# Altium PCB PCB1.PcbDoc (part 2 of 3)
Units mm, origin at the board's own origin, x right, y up, seen from the top; angles counter-clockwise.
Board outline 200 x 55 mm, 4 copper layers (Top Layer, Power Layer, GND Layer, Bottom Layer), stack 1.714 mm thick; 304 components, 225 nets, 1091 pads, 659 vias.
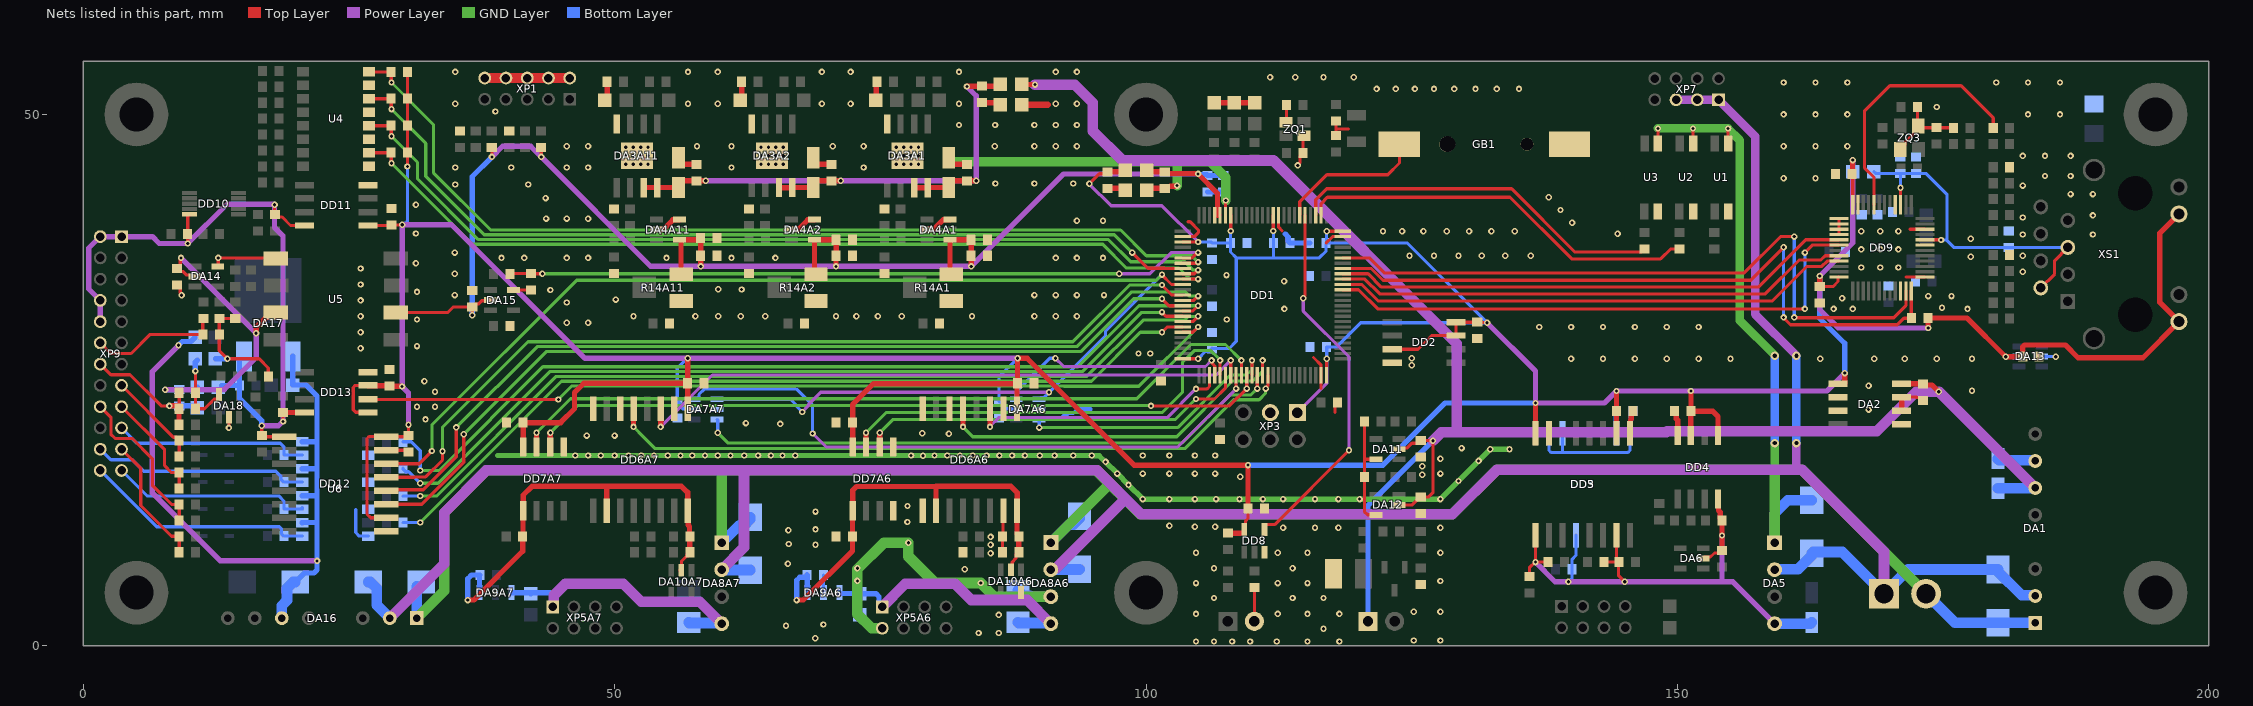
[diagram p4: the nets of this part, all layers, seen from the top]

## Via types
v1: diameter 0.6, hole 0.3, Top Layer to Bottom Layer, tented both sides, 643 vias
v2: diameter 0.6, hole 0.3, Top Layer to Bottom Layer, 12 vias
v3: diameter 0.8, hole 0.4, Top Layer to Bottom Layer, tented both sides, 4 vias

## Nets (pads, with @x,y where several pads share a name; then routed paths per layer and width w, separated by ;. In a path a pad name is that pad's centre, name@x,y a point inside that pad or via, vN(x,y) a via of type N, cw(c..) or ccw(c..) an arc to the next point about the centre after c; other vN are vias at no path point) (continued)
+3.3V: C5.1 C6.1 C8.2 C9.2 C10.2 C15.1 C16.1 C22.1 C32.1 C33.1 C34.1 C42A6.1 C42A7.1 C43A6.1 C43A7.1 C44A6.1 C44A7.1 C57.1 C60.1 C65.1 C70.1 C82.1 C83.1 C86.1 DA2.1 DA7A6.5 DA7A7.5 DA13.5 DD1.11 DD1.19 DD1.28 DD1.50 DD1.75 DD1.100 DD2.3 DD2.7 DD2.8 DD3.10 DD3.16 DD4.1 DD4.3 DD5.7 DD6A6.1 DD6A7.1 DD7A6.8 DD7A7.8 DD8.5 DD9.24 DD9.36 DD11.1 DD12.10 DD12.16 DD13.1 DD13.3 L2.1 L5.1 R34.2 R49.2 R70.1 R72.1 R73.1 R74.1 XP3.1 XS1.9 XS1.11 | length 505.8
  Top Layer w0.3: DD13.1@26.8,21.95 26.776,21.974 25.626,21.974 25.4,22.2 25.4,24.3 25.6,24.5 DD13.3@26.8,24.5 DD13.3@26.825,24.475 ; DD11.1@26.8,39.544 28.944,39.544 C82.1@29,39.6 v1@30.005,39.6 ; DD12.16@28.485,19.685 26.876,19.685 26.7,19.509 26.7,12.39 27.04,12.05 DD12.10@28.5,12.05 ; DD12.16@28.5,19.67 30.47,19.67 C83.1@30.6,19.8 v1(30.6,20.8) ; C86.1@28.775,24.475 C86.1@28.8,24.45 ; v1(30.5,45.1) R74.1@30.5,46.4 R72.1@30.5,51.5 R70.1@30.5,54 ; v1(94.675,43.475) 95.616,44.416 96.182,44.416 C5.1@96.365,44.6 ; L2.1@97.915,44.6 L2.1@98.065,44.75 ; DD1.50@103.45,27 v1(104.9,27) ; DD1.28@103.45,38 v1(104.9,38) ; v1(107.975,39.025) DD1.19@107.975,40.525 ; DD8.5@109.125,10.6 109.25,10.725 DD8.5@109.25,10.95 109.375,11.075 109.375,11.75 109.6,11.975 C57.1@109.6,12.9 ; v1(111.975,39.025) DD1.11@111.975,40.525 ; DD1.75@116.975,25.475 116.975,26.975 v1(117,27) ; v1(117,39) DD1.100@118.5,39 ; DD2.3@123.171,27.896 125.596,27.896 126.896,29.196 DD2.7@129.171,29.196 DD2.8@129.171,30.446 C22.1@131.171,30.446 131.193,30.423 132.077,30.423 v1(132.1,30.4) ; C70.1@163.4,33.8 164.644,33.8 165.12,34.276 165.12,34.7 DD9.36@165.2,34.7 ; C65.1@166.475,44.425 C65.1@166.45,44.4 166.5,44.35 DD9.24@166.5,41.5 ; v1@166.475,45.675 v1(166.5,45.7)
  Top Layer w0.5: DD13.3@26.825,24.475 C86.1@28.775,24.475 ; C86.1@28.825,24.425 28.831,24.419 29.981,24.419 v1(30,24.4) ; DD7A7.8@41.4,18.7 41.388,18.712 41.388,20.987 C44A6.1@41.375,21 44.922,21 46.225,22.303 46.225,23.822 47.103,24.7 C43A6.1@56.875,24.7 DD6A7.1@56.875,22.31 ; C43A6.1@56.885,24.71 v1@56.885,27.04 ; DD7A6.8@72.4,18.7 C44A7.1@72.4,21 72.4,22.7 74.365,24.665 87.865,24.665 DD6A6.1@87.865,22.303 ; C43A7.1@87.9,24.7 v1@87.9,27.034 ; v1(87.916,27.05) 88.825,27.05 98.875,17 v1(109.6,17) C57.1@109.6,12.9 ; C5.1@96.365,44.6 L2.1@97.915,44.6 ; R34.2@107.7,10.6 DD8.5@109.125,10.6 ; DD3.16@136.65,20.01 v1(136.65,22.85) ; DD3.10@144.27,20.01 144.27,22.675 ; 144.275,22.675 v1(144.275,23.975) ; DD4.3@151.274,19.801 C32.1@151.275,22.075 ; v1(151.275,23.975) C32.1@151.275,22.075 153.325,22.075 153.824,21.576 DD4.1@153.824,19.8 ; C70.1@163.4,33.8 v1(163.4,34.8) ; DA2.1@165.1,24.65 165.7,24.65 165.75,24.7 v1(165.75,25.654) ; C65.1@166.475,44.425 v1@166.475,45.675 ; v1(173.6,29.9) 173.585,29.915 173.585,30.835 R49.2@173.57,30.85 177.25,30.85 v1(180.9,27.2) 182.475,27.2 C60.1@182.5,27.225 182.5,28.124 182.676,28.3 186.512,28.3 187.712,27.1 193.8,27.1 XS1.9@197.2,30.5 195.4,32.3 195.4,38.83 XS1.11@197.2,40.63
  Power Layer w0.3: 61.825,27.05 61.875,27.1 ; v1(94.675,43.475) 94.675,43.44 96.715,41.4 101.5,41.4 v1(104.9,38) ; XP3.1@114.24,21.94 117,24.7 v1(117,27)
  Power Layer w0.5: v1(30.6,20.8) 30.6,23.8 v1(30,24.4) 30.009,24.409 30.009,39.631 34.623,39.631 47.204,27.05 v1(56.875,27.05) 59.363,27.05 ; 59.364,27.05 61.825,27.05 v1(87.916,27.05) ; v1(132.1,30.4) 136.65,25.85 v1(136.65,22.85) 143.15,22.85 v1(144.275,23.975) v1(151.275,23.975) 164.071,23.975 v1(165.75,25.654) ; v1(166.5,45.7) 166.5,37.9 v1(163.4,34.8) 163.4,31.644 165.144,29.9 v1(173.6,29.9)
  Bottom Layer w0.3: v1(30.017,39.612) 30.099,39.612 30.249,39.762 30.324,39.762 30.5,39.938 v1(30.5,45.1) ; C42A7.1@55.9,23 55.9,26.125 56.825,27.05 v1(56.875,27.05) ; C42A7.1@55.95,23 56.225,22.725 56.225,22.476 56.401,22.301 57.44,22.301 DA7A7.5@57.491,22.25 ; DA7A6.5@87.789,22.25 87.743,22.296 86.67,22.296 86.494,22.472 86.494,22.725 86.219,23 C42A6.1@86.169,23 86.169,25.303 v1(87.916,27.05) ; v1(104.9,27) 105.6,27.7 105.9,27.7 C10.2@106.224,28.024 ; v1(104.9,38) 106.1,38 C9.2@106.2,37.9 C6.1@107.95,37.9 ; C10.2@106.2,27.975 107.826,27.975 108.5,28.649 108.5,36.5 ; v1(107.975,39.025) 107.962,39.013 107.962,37.912 C6.1@107.95,37.9 ; v1(111.975,39.025) 111.987,39.013 C8.2@111.987,37.9 ; C8.2@112,37.9 112,36.5 ; v1(117,27) C16.1@117,28.1 117.895,28.1 120.195,30.4 v1(132.1,30.4) 124.6,37.9 C15.1@116.95,37.9 ; v1(117,39) 116.975,38.975 116.975,37.925 C15.1@116.95,37.9 ; L5.1@166.5,44.6 v1(166.5,45.7) ; v1(180.9,27.2) 180.912,27.212 182.137,27.212 DA13.5@182.15,27.225 ; C6.1@107.95,37.9 107.95,37.05 108.5,36.5 ; 108.5,36.5 112,36.5 ; 112,36.5 116.3,36.5 116.95,37.15 C15.1@116.95,37.9
  Bottom Layer w0.5: v1(109.6,17) 122.3,17 128.15,22.85 v1@136.623,22.85 ; DD5.7@144.252,20.01 C33.1@144.252,22.052 ; C33.1@144.279,22.079 v1@144.279,23.971 ; v1(163.4,34.8) 163.4,30.804 165.75,28.454 v1(165.75,25.654)
+3.3VA: C7.2 C11.1 C13.2 C28A1.1 C28A2.1 C28A11.1 C29A1.1 C29A2.1 C29A11.1 C84.1 DA4A1.4 DA4A2.4 DA4A11.4 DA15.2 DD1.21 DD1.22 L2.2 R14A1.3 R14A2.3 R14A11.3 R15A3.1 R15A4.1 U5.6 | length 138.8
  Top Layer w0.3: U5.6@29.399,31.35 34.275,31.35 34.804,31.879 C84.1@36.6,31.879 ; v1(36.6,31.1) C84.1@36.6,31.879 ; DA15.2@38.324,32.529 38.26,32.465 37.477,32.465 37.166,32.154 36.875,32.154 C84.1@36.6,31.879 ; R15A4.1@38.433,46.875 38.45,46.858 v1(38.45,46) ; v1@43.083,46.01 43.099,46.026 43.099,46.86 R15A3.1@43.083,46.875 ; L2.2@100.065,44.75 L2.2@100.215,44.6 ; DD1.22@106.475,40.525 106.725,40.525 DD1.21@106.975,40.525
  Top Layer w0.5: R14A11.3@56.25,34.955 56.25,38.18 DA4A11.4@56.225,38.205 ; v1(58.1,35.7) C29A11.1@58.1,36.705 58.1,38.205 DA4A11.4@56.225,38.205 ; R14A2.3@68.8,34.955 DA4A2.4@68.8,38.205 C28A2.1@70.85,38.205 C29A2.1@70.85,36.705 70.838,36.692 70.838,35.713 v1(70.825,35.7) ; R14A1.3@81.55,34.955 DA4A1.4@81.55,38.205 C28A1.1@83.525,38.205 ; v1(83.55,35.7) C29A1.1@83.55,36.705 C28A1.1@83.55,38.18 ; L2.2@100.215,44.6 C11.1@101.765,44.6 101.928,44.438 104.835,44.438 104.873,44.4 v1(104.9,44.4) ; v1@104.881,44.419 106.725,42.575 106.725,40.525 ; DA4A11.4@56.225,38.205 DA4A11.4@56.1,38.205 DA4A11.4@56.225,38.205
  Power Layer w0.5: v1(38.45,46) 39.454,47.004 42.095,47.004 v1(43.099,46) 53.399,35.7 v1(58.1,35.7) v1(70.825,35.7) v1(83.55,35.7) 92.25,44.4 v1(104.9,44.4)
  Bottom Layer w0.5: v1(36.6,31.1) 36.6,44.151 v1@38.449,46 ; v1(104.9,44.4) 104.957,44.343 105.707,44.343 C13.2@105.8,44.25 105.804,44.254 107.262,44.254 C7.2@107.266,44.258
+3.3VA_ETH: C58.1 C69.1 C72.1 DD9.8 DD9.15 L5.2 XS1.2 XS1.5 | length 33.6
  Top Layer w0.3: DD9.15@171,41.5 v1(171,43.1) ; DD9.8@173.3,38.2 174.797,38.2 v1(174.816,38.182) ; XS1.2@184.2,33.677 185.5,34.977 185.5,36.247 XS1.5@186.74,37.487
  Bottom Layer w0.3: L5.2@168.5,44.6 168.65,44.45 C69.1@170.975,44.45 ; v1(171,43.1) 171,44.425 C69.1@170.975,44.45 ; v1(174.816,38.182) 175.382,38.182 ; XS1.5@186.74,37.487 C58.1@181.179,37.487 176.013,37.487 175.382,38.118 175.382,42.433 173.365,44.45 C72.1@172.442,44.45 C69.1@170.975,44.45
+5V: C2.1 C4.1 C53.1 C54.1 DA1.6 DA2.8 DA11.2 DA12.2 L1.1 XP6.1 | length 162.6
  Top Layer w0.3: L1.1@88.285,52.859 L1.1@88.335,52.809 ; DA11.2@123.8,18.5 123.921,18.621 124.59,18.621 125.019,19.05 125.575,19.05 C53.1@125.85,19.325 125.863,19.312 126.988,19.312 v1(127,19.3) 127,14.4 126.607,14.007 C54.1@125.85,14.007 125.8,14.007 125.05,13.257 124.121,13.257 123.996,13.382 DA12.2@123.871,13.257
  Top Layer w0.5: L1.1@88.335,52.809 v1(89.55,52.809) ; DA2.8@170.735,24.65 DA2.8@171.1,24.65 C4.1@173.1,24.65 173.209,24.541 173.952,24.541 v1@174.574,23.919
  Power Layer w1: v1@89.55,52.8 93.3,52.8 95,51.1 95,48.444 97.786,45.658 111.992,45.658 129.225,28.424 129.225,20.1 ; v1(127,19.3) 127.8,20.1 129.225,20.1 ; v1(174.593,23.9) 172.465,23.9 168.765,20.2 149.045,20.2 148.945,20.1 129.225,20.1 ; v1@174.625,23.9 DA1.6@183.675,14.85
  Bottom Layer w0.5: XP6.1@120.896,2.3 120.896,13.196 v1(127,19.3)
  Bottom Layer w1: C2.1@180.175,14.813 180.194,14.831 183.656,14.831 DA1.6@183.675,14.85
+5V_DRVA6: C46A6.1 C47A6.1 C50A6.1 C51A6.1 DA9A6.1 DA10A6.2 DD6A6.10 DD6A6.16 DD7A6.1 | length 43.4
  Top Layer w0.3: C47A6.1@72.375,10.3 C47A6.1@72.388,10.313 ; DD7A6.1@72.388,12.688 DD7A6.1@72.4,12.7 ; DA10A6.2@87.285,7.153 87.41,7.278 87.41,7.878 87.76,8.228 87.76,8.578 C50A6.1@88.035,8.853 ; C46A6.1@87.865,10.523 C46A6.1@88.035,10.353 ; DD6A6.16@87.865,12.753 DD6A6.16@87.871,12.759
  Top Layer w0.5: v1(67.125,4.3) 67.75,4.3 72.375,8.925 C47A6.1@72.375,10.3 ; C47A6.1@72.388,10.313 DD7A6.1@72.388,12.688 ; DD7A6.1@72.4,12.7 72.4,14.625 72.763,14.988 80.245,14.988 DD6A6.10@80.245,12.703 ; 80.245,15 87.3,15 87.871,14.429 DD6A6.16@87.871,12.759 ; C46A6.1@87.865,10.523 DD6A6.16@87.865,12.753 ; C50A6.1@88.035,8.853 C46A6.1@88.035,10.353
  Bottom Layer w0.5: v1(67.125,4.3) 67.125,6.153 67.418,6.445 67.92,6.445 68.095,6.62 C51A6.1@68.095,6.67 68.12,6.645 68.12,5.028 DA9A6.1@68.145,5.003
+5V_DRVA7: C46A7.1 C47A7.1 C50A7.1 C51A7.1 DA9A7.1 DA10A7.2 DD6A7.10 DD6A7.16 DD7A7.1 | length 43.5
  Top Layer w0.3: DA10A7.2@56.293,7.118 56.299,7.124 56.299,7.974 C50A7.1@56.9,8.575
  Top Layer w0.5: v1(36.175,4.3) 36.75,4.3 41.35,8.9 C47A7.1@41.35,10.3 41.375,10.325 41.375,12.675 DD7A7.1@41.4,12.7 ; DD7A7.1@41.4,12.732 41.4,14.175 42.232,15.007 49.245,15.007 ; DD6A7.10@49.245,12.7 49.245,15.007 ; DA10A7.2@56.275,7.1 DA10A7.2@56.293,7.118 ; C50A7.1@56.9,8.575 57.075,8.75 C50A7.1@57.075,8.8 C46A7.1@57.075,10.3 57.075,10.495 57.045,10.525 57.045,11.231 56.915,11.361 56.915,12.65 DD6A7.16@56.865,12.7 56.865,14.435 56.293,15.007 49.245,15.007
  Bottom Layer w0.5: v1(36.175,4.3) 36.175,6.3 36.542,6.667 C51A7.1@37.333,6.667 37.275,6.609 DA9A7.1@37.275,5
+5V_HW: C75.1 C80.1 C81.1 C89.1 C90.1 DA17.3 DD10.10 DD11.8 DD12.1 DD13.8 L6.1 XP9.1 XP9.2 XP9.8 XP9.10 | length 71.1
  Top Layer w0.3: v1(9.825,37.85) C75.1@9.825,38.75 9.825,40.55 DD10.10@10.025,40.55 ; C81.1@16.8,19.8 v1(16.8,20.7) ; C81.1@17.1,19.695 17.125,19.67 DD12.1@18.8,19.67 ; v1(18,41.5) 18,40.625 C80.1@18.025,40.6 18.281,40.344 18.705,40.344 19.499,39.55 DD11.8@20.8,39.55 ; v1(18.8,21.1) C89.1@18.8,21.95
  Top Layer w0.5: C89.1@18.8,21.95 DD13.8@20.8,21.95
  Power Layer w0.5: XP9.10@1.6,30.5 XP9.8@1.6,32.5 0.518,33.582 0.518,37.418 XP9.2@1.6,38.5 XP9.1@3.6,38.5 6.5,38.5 7.15,37.85 v1(9.825,37.85) 13.525,41.55 17.95,41.55 v1(18,41.5) 18,39.375 18.8,38.575 v1(18.8,21.1) 18.773,21.1 18.373,20.7 v1(16.8,20.7)
  Bottom Layer w0.5: L6.1@13,24.5 C90.1@14.7,24.5 ; DA17.3@14.7,26.804 C90.1@14.7,24.5 ; v1@16.767,20.733 16.781,20.746 16.781,21.194 14.7,23.275 C90.1@14.7,24.5
+5V_PS: C35.1 C36.1 C37.1 C38.1 C40.1 DA5.4 DA6.2 DD3.1 DD3.7 DD4.8 DD5.13 R18.1 R20.1 R21.1 | length 55.8
  Top Layer w0.3: R20.1@136.075,6.5 136.075,7.35 136.6,7.875 v1(136.65,7.875) ; DD3.1@136.65,10.41 v1(136.65,7.875) ; R18.1@137.824,7.875 v1(136.65,7.875) ; R21.1@143.1,7.875 C36.1@144.456,7.875 ; DD3.7@144.27,10.41 144.27,8.13 C36.1@144.5,7.9 ; C36.1@144.5,7.875 C36.1@144.456,7.875 ; v1(145.05,6.025) 144.456,6.619 C36.1@144.456,7.875 ; DA6.2@152.425,8.225 152.55,8.35 153.114,8.35 153.491,8.728 153.953,8.728 C40.1@154.2,8.975
  Top Layer w0.5: DD4.8@153.824,13.8 153.874,13.75 153.874,12.726 154.025,12.575 154.025,11.975 C37.1@154.2,11.8 ; C40.1@154.2,9.075 v1(154.2,10.375) C37.1@154.2,11.8 ; C37.1@154.2,11.85 C37.1@154.2,11.8
  Power Layer w0.5: v1(136.65,7.875) 138.5,6.025 v1(139.75,6.025) v1(145.05,6.025) 155.205,6.025 ; 154.2,6.075 v1(154.2,10.375) ; 155.24,5.99 DA5.4@159.15,2.08
  Bottom Layer w0.3: v1(139.75,6.025) 140.1,6.375 C38.1@140.1,7.2 140.1,8.15 140.46,8.51 DD5.13@140.46,10.41
  Bottom Layer w1: DA5.4@159.15,2.08 162.53,2.08 C35.1@162.65,2.2
+5VA: C3.1 C25A1.1 C25A2.1 C25A11.1 C26A1.1 C26A2.1 C26A11.1 DA3A1.7 DA3A1.8 DA3A2.7 DA3A2.8 DA3A11.7 DA3A11.8 L1.2 | length 56.6
  Top Layer w0.3: C3.1@84.56,52.634 C3.1@84.585,52.659 ; L1.2@86.085,52.659 L1.2@86.285,52.859
  Top Layer w0.5: DA3A11.7@52.75,43.105 52.775,43.13 C26A11.1@56,43.13 56,43.405 56.35,43.755 C25A11.1@57.695,43.755 ; C25A11.1@57.7,43.755 57.703,43.752 58.573,43.752 v1(58.575,43.75) ; DA3A2.7@65.466,43.106 DA3A2.8@66.716,43.106 66.741,43.131 C26A2.1@68.691,43.131 68.691,43.306 69.141,43.756 C25A2.1@70.403,43.756 70.406,43.753 71.272,43.753 v1(71.275,43.75) ; DA3A1.7@78.2,43.105 DA3A1.8@79.45,43.105 79.475,43.13 C26A1.1@81.45,43.13 81.45,43.305 81.9,43.755 C25A1.1@83.15,43.755 83.153,43.752 84.023,43.752 v1(84.025,43.75) ; v1(83.15,52.625) 83.167,52.642 84.552,52.642 C3.1@84.56,52.634 ; C3.1@84.585,52.659 L1.2@86.085,52.659
  Power Layer w0.5: v1(58.575,43.75) v1(71.275,43.75) v1(84.025,43.75) 84.025,51.75 v1(83.15,52.625)
+5VA_HW: C77.1 C94.1 DA14.2 L6.2 U5.3 | length 31.4
  Top Layer w0.3: v1(9.2,36.5) 9.2,36.419 9.125,36.344 9.125,35.775 8.85,35.5 C77.1@8.8,35.5 9.075,35.225 9.377,35.225 9.727,34.875 10.377,34.875 DA14.2@10.502,34.75
  Top Layer w0.5: v1(16.267,29.41) 16.286,29.429 16.286,30.012 17.224,30.95 17.724,30.95 U5.3@18.124,31.35
  Power Layer w0.5: v1(7.7,24.1) 13.262,24.1 16.267,27.105 16.267,29.422 9.2,36.488 v1(9.2,36.5)
  Bottom Layer w0.5: v1(7.7,24.1) 7.703,24.097 C94.1@9.032,24.097 ; C94.1@9.032,24.12 10.512,24.12 L6.2@10.717,24.325
+12V_DRVA6: C45A6.1 C48A6.2 DA8A6.4 DA9A6.3 XP5A6.1 | length 26.5
  Power Layer w1: XP5A6.1@75.185,3.653 77.357,5.825 82.023,5.825 83.545,4.303 88.825,4.303 DA8A6.4@91.045,2.083
  Bottom Layer w0.5: DA9A6.3@71.145,5.003 71.145,4.947 71.18,4.912 C48A6.2@73.045,4.912 ; C48A6.2@73.053,4.903 74.589,4.903 74.882,4.611 74.882,3.956 XP5A6.1@75.185,3.653
  Bottom Layer w1: C45A6.1@87.955,2.204 88.015,2.144 90.984,2.144 DA8A6.4@91.045,2.083
+12V_DRVA7: C45A7.1 C48A7.2 DA8A7.4 DA9A7.3 XP5A7.1 | length 27.2
  Power Layer w1: XP5A7.1@44.175,3.65 44.275,3.75 44.275,4.725 45.375,5.825 50.824,5.825 52.499,4.15 58.005,4.15 DA8A7.4@60.075,2.08
  Bottom Layer w0.5: DA9A7.3@40.275,5 42,5 C48A7.2@42.1,4.9 ; C48A7.2@42.1,5 43.882,5 44.175,4.707 XP5A7.1@44.175,3.65
  Bottom Layer w1: C45A7.1@56.975,2.2 57.035,2.14 60.015,2.14 DA8A7.4@60.075,2.08
+24V: C1.1 C31.1 C41A6.1 C41A7.1 C87.1 DA1.2 DA5.2 DA8A6.2 DA8A7.2 DA16.2 XP2.1 XP7.1 XP7.3 XP7.5 | length 260.3
  Power Layer w0.8: XP7.5@149.875,51.375 XP7.3@151.875,51.375 XP7.1@153.875,51.375 157.324,47.926 157.324,31.176 v3(161.2,27.3) ; 161.2,16.575 v3(161.2,19.075)
  Power Layer w1: DA16.2@28.84,2.6 33.952,7.712 33.952,12.527 37.925,16.5 62.172,16.5 ; DA8A7.2@59.998,7.237 DA8A7.2@60.075,7.16 62.172,9.257 62.172,16.5 ; DA8A6.2@91.045,7.163 91.121,7.24 91.481,7.24 97.794,13.554 ; XP2.1@169.44,4.9 169.44,8.86 161.725,16.575 161.2,16.575 133.025,16.575 128.824,12.374 99.526,12.374 95.4,16.5 62.172,16.5
  Bottom Layer w0.8: DA8A7.2@59.96,7.275 DA8A7.2@60.075,7.16 ; v3(161.2,19.075) v3(161.2,27.3)
  Bottom Layer w1: C87.1@26.8,6 27,6 27.6,5.4 27.6,3.84 DA16.2@28.783,2.657 ; DA8A7.2@60.075,7.16 60.105,7.13 62.745,7.13 C41A7.1@62.775,7.1 ; DA8A6.2@91.045,7.163 91.065,7.183 93.725,7.183 C41A6.1@93.745,7.203 ; DA5.2@159.15,7.16 159.19,7.2 161.35,7.2 162.65,8.5 C31.1@162.65,8.7 162.775,8.825 165.515,8.825 XP2.1@169.44,4.9 171.721,7.181 C1.1@180.175,7.181 180.175,6.981 182.408,4.747 183.618,4.747 DA1.2@183.675,4.69
+24V_HW: C88.2 C91.1 DA16.6 DA17.1 L7.1 U6.10 U6.12 U6.14 U6.16 | length 68.9
  Power Layer w0.5: v1@8.944,28.254 6.5,25.81 6.5,14.391 12.903,7.988 v1(22,7.988)
  Bottom Layer w0.5: v1(8.964,28.273) 8.964,28.287 9.309,28.633 10.136,28.633 L7.1@10.518,29.015 ; DA17.1@19.7,27.229 C88.2@19.7,24.535 20.956,24.535 22,23.492 22,19.21 ; C91.1@19.959,6 20.804,6.845 21.707,6.845 22,7.138 v1(22,7.988) 22,11.595 ; U6.10@20.6,11.59 20.605,11.595 22,11.595 ; U6.12@20.6,14.13 21.994,14.13 22,14.124 ; U6.14@20.6,16.67 21.921,16.67 22,16.591 ; U6.16@20.6,19.21 22,19.21 ; 22,11.595 22,14.124 ; 22,14.124 22,16.591 ; 22,16.591 22,19.21
  Bottom Layer w1: DA16.6@18.68,2.6 18.68,3.78 19.169,4.269 19.169,5.4 19.769,6 C91.1@19.959,6
+24VA_HW: C93.1 C95.1 DA18.5 L7.2 | length 7.7
  Top Layer w0.3: v1(10.55,25.85) 10.558,25.842 C95.1@10.558,23.823 ; C95.1@10.574,23.864 C93.1@10.575,22.3 C93.1@10.575,22.3 11.408,22.3 12.308,23.2 12.633,23.2 12.758,23.325 DA18.5@12.758,23.65
  Bottom Layer w0.5: v1(10.55,25.85) 10.534,25.866 10.534,26.67 L7.2@10.753,26.888
+VBAT: DD1.6 GB1.2 | length 13.9
  Top Layer w0.3: DD1.6@114.475,40.525 114.475,41.777 117.023,44.325 122.75,44.325 123.85,45.425 GB1.2@123.85,47.2
ACTn: DD9.20 R41.2 | length 24.5
  Top Layer w0.3: DD9.20@168.5,41.5 168.5,44.1 167.6,45 167.6,50.3 170,52.7 176.7,52.7 179.725,49.675 R41.2@179.725,48.712
AGND: C3.2 C7.1 C11.2 C13.1 C23A1.1 C23A2.1 C23A11.1 C25A1.2 C25A2.2 C25A11.2 C26A1.2 C26A2.2 C26A11.2 C27A1.2 C27A2.2 C27A11.2 C28A1.2 C28A2.2 C28A11.2 C29A1.2 C29A2.2 C29A11.2 C30A3.2 C30A4.2 C84.2 C85.2 DA3A1.4 DA3A1.EPAD DA3A2.4 DA3A2.EPAD DA3A11.4 DA3A11.EPAD DA4A1.2 DA4A1.6 DA4A2.2 DA4A2.6 DA4A11.2 DA4A11.6 DA15.5 DD1.20 R1.2 R2.2 R8A1.2 R8A2.2 R8A11.2 R11A1.2 R11A2.2 R11A11.2 R13A1.1 R13A2.1 R13A11.1 R14A1.1 R14A2.1 R14A11.1 R75.2 XP1.2 XP1.4 XP1.6 XP1.8 XP1.10 | length 76.7
  Top Layer w0.3: DA15.5@40.474,33.479 C85.2@42.124,33.479 ; R1.2@86.085,51.109 R1.2@86.285,50.909 ; DD1.20@107.475,40.525 107.475,41.875 v1(107.5,41.9)
  Top Layer w0.5: R8A11.2@49.075,51.34 49.3,51.565 C23A11.1@49.3,53.075 ; DA4A11.2@53.95,39.155 53.975,39.18 54.575,39.18 55.475,40.08 56.075,40.08 DA4A11.6@56.1,40.105 ; C26A11.2@56,45.93 56,45.655 56.35,45.305 C25A11.2@57.695,45.305 ; R8A2.2@61.768,51.341 61.953,51.526 C23A2.1@61.953,53.076 ; DA4A2.2@66.65,39.155 66.675,39.18 67.275,39.18 68.175,40.08 68.775,40.08 DA4A2.6@68.8,40.105 ; C26A2.2@68.691,45.931 68.691,45.656 69.041,45.306 C25A2.2@70.403,45.306 ; R8A1.2@74.55,51.34 74.625,51.415 74.625,53 C23A1.1@74.7,53.075 ; DA4A1.2@79.4,39.155 79.425,39.18 80.016,39.18 80.916,40.08 81.525,40.08 DA4A1.6@81.55,40.105 ; C26A1.2@81.45,45.93 81.45,45.655 81.8,45.305 C25A1.2@83.15,45.305 ; C3.2@84.585,51.109 R1.2@86.085,51.109 ; R2.2@100.065,42.85 100.265,43.05 C11.2@101.715,43.05 ; C11.2@101.765,43.05 101.94,43.225 102.282,43.225 102.283,43.226 102.824,43.226 102.898,43.3 v1(102.925,43.3)
  Top Layer w0.9: XP1.10@37.774,53.425 XP1.8@39.774,53.425 XP1.6@41.774,53.425 XP1.4@43.774,53.425 XP1.2@45.774,53.425
  GND Layer w0.9: XP1.10@37.774,53.425 XP1.2@45.774,53.425 ; 81.443,45.535 102.961,45.535 ; v1(102.925,43.3) 102.961,43.336 102.961,45.535 ; v1(107.5,41.9) 107.5,44.09 106.054,45.535 102.961,45.535
  Bottom Layer w0.5: C13.1@105.8,42.7 105.804,42.704 107.262,42.704 C7.1@107.266,42.708 107.306,42.708 107.481,42.533 107.481,41.918 v1@107.499,41.9
  other v1: 45.5,30.4 47.5,30.4 51.775,31 57.6,31 59.75,31 61.875,31 64.175,31 70.825,31 72.75,31 74.775,31 77.025,31 83.625,31 45.5,32.3 50.1,32.575 34.95,33 43.95,33.475 61.95,33.525 59.75,33.55 34.95,35 39.35,36.5 41.5,36.5 45.5,36.5 47.5,36.5 54.875,36.5 61,36.5 65.125,36.5 34.95,37 47.5,40.175 43.55,40.2 45.5,40.2 43.5,42.125 35,43.4 41.875,43.4 85.825,43.5 35,45 40.275,45 45.5,45 47.5,45 61,45 73.425,45 63.766,45.306 64.466,45.306 65.166,45.306 65.866,45.306 76.5,45.305 77.2,45.305 77.9,45.305 78.6,45.305 63.766,46.106 64.466,46.106 65.166,46.106 65.866,46.106 76.5,46.105 77.2,46.105 77.9,46.105 78.6,46.105 63.766,46.906 64.466,46.906 65.166,46.906 65.866,46.906 76.5,46.905 77.2,46.905 77.9,46.905 78.6,46.905 45.5,47 47.5,47 57.75,47 61,47 70.525,47 73.425,47 85.775,47 82.4,49 85.8,49 38.775,50.275 35,51 56.9,51 59.7,51 69.5,51 72.2,51 82.4,51 35,54 56.9,54 59.7,54 69.5,54 72.2,54 82.4,54
  other v2: 51.05,45.305 51.75,45.305 52.45,45.305 53.15,45.305 51.05,46.105 51.75,46.105 52.45,46.105 53.15,46.105 51.05,46.905 51.75,46.905 52.45,46.905 53.15,46.905
AGND_HW: C77.2 C92.2 C93.2 C94.2 C95.2 DA14.5 DA18.2 R52.2 R59.2 R71.2 R82.2 R83.1 R84.2 U5.1 XP9.14 | length 35
  Top Layer w0.3: XP9.14@1.6,26.5 2.6,25.5 4.4,25.5 7.325,22.575 v1(8.1,22.575) ; C77.2@8.8,33.95 8.85,33.95 9.125,33.675 9.125,33.196 9.25,33.071 v1(9.25,32.99) ; C95.2@9.024,23.864 9.024,22.575 C93.2@9.025,22.3 C93.2@9.025,22.3 ; DA14.5@12.652,35.7 12.7,35.748 v1(12.7,36.5) 18.074,36.5 U5.1@18.124,36.45 ; R52.2@12.8,29.3 12.788,29.288 12.788,27.772 v1(13.56,27) 16.549,27 17.408,26.141 R83.1@17.408,25.345 ; R52.2@12.8,29.525 R59.2@12.8,30.8 R71.2@14.3,30.8 ; v1(13.7,20.5) 13.704,20.504 13.704,21.496 DA18.2@13.708,21.5
  Top Layer w0.5: v1(8.1,22.575) 8.875,22.575 C93.2@9.152,22.298 ; C92.2@9,20.802 C93.2@9,22.275
  Bottom Layer w0.3: R84.2@12.438,27.015 R84.2@12.453,27
  Bottom Layer w0.5: v1(8.1,22.575) 10.542,22.575 R82.2@10.717,22.4 ; R84.2@12.453,27 v1(13.56,27)
AN_MOD_HW: R52.1 R55.1 XP9.12 | length 12.3
  Top Layer w0.3: XP9.12@1.6,28.5 2.6,27.5 4.5,27.5 6.3,29.3 R52.1@11.25,29.3 11.25,30.75 R55.1@11.3,30.8
COM1_HW: R54.2 R61.1 XP9.17 | length 10.4
  Top Layer w0.3: XP9.17@3.6,22.5 7.648,18.452 7.648,16.952 8.3,16.3 R54.2@9.025,16.3 R61.1@9.025,14.8
COM2_HW: R57.2 R68.1 XP9.18 | length 15.1
  Top Layer w0.3: XP9.18@1.6,22.5 2.6,21.5 2.6,19.9 3,19.5 4.6,19.5 6.5,17.6 6.5,15.1 8.3,13.3 R57.2@9.025,13.3 R68.1@9.025,11.8
COM3_HW: R60.2 R62.1 XP9.21 | length 12.4
  Top Layer w0.3: XP9.21@3.6,18.5 5.4,16.7 5.4,13.2 8.3,10.3 R60.2@9.025,10.3 9.025,10.152 R62.1@9.025,8.8
CRASH_IND: DD1.3 R32.2 | length 35.4
  Top Layer w0.3: DD1.3@115.975,40.525 115.975,41.975 117,43 134.4,43 140.35,37.05 146.625,37.05 R32.2@146.9,37.325
DIG_MOD_HW: R51.2 R67.1 XP9.15 | length 9.1
  Top Layer w0.3: XP9.15@3.6,24.5 8.475,19.625 8.75,19.625 9.025,19.35 R51.2@9.025,19.3 R67.1@9.025,17.8
DRV1_AN_MOD: DD1.63 DD6A6.5 | length 35.2
  Top Layer w0.3: v1(82.775,20.6) v1@82.78,20.605 ; DD6A6.5@82.78,22.268 DD6A6.5@82.793,22.281 ; DD1.63@110.975,25.475 v1(110.975,26.85)
  Top Layer w0.5: v1@82.78,20.605 DD6A6.5@82.78,22.268
  GND Layer w0.3: v1(82.775,20.6) 83.698,19.677 102.902,19.677 108.138,24.913 110.056,24.913 110.975,25.831 v1@110.975,26.829
DRV1_DIG_MOD: DA7A6.3 DD1.61 | length 25.2
  Top Layer w0.3: DD1.61@109.975,25.475 v1@109.975,26.8
  GND Layer w0.3: v1(89.95,20.525) 102.975,20.525 107.925,25.475 109.45,25.475 109.975,26 v1(109.975,26.85)
  Bottom Layer w0.3: DA7A6.3@89.939,21.3 89.95,21.289 v1(89.95,20.525)
DRV1_ERR1: DD1.55 DD7A6.7 | length 41
  Top Layer w0.3: DD1.55@106.975,25.475 v1(106.975,26.85)
  Top Layer w0.5: DD7A6.7@73.65,18.716 v1@73.65,20.023
  GND Layer w0.3: v1(73.65,20.05) 75.55,21.95 101.525,21.95 103.436,23.861 103.436,26.676 104.534,27.775 106.1,27.775 v1@106.8,27.075
DRV1_ERR2: DD1.56 DD7A6.6 | length 36.6
  Top Layer w0.3: v1(104.7,23.225) 106.45,23.225 107.475,24.25 DD1.56@107.475,25.475
  Top Layer w0.5: DD7A6.6@74.95,18.895 v1(74.95,20.05)
  GND Layer w0.3: v1(74.95,20.05) 76.2,21.3 102.775,21.3 v1(104.7,23.225)
DRV1_ON: DD1.53 DD6A6.3 | length 25
  Top Layer w0.3: v1(104.7,24.175) 105.75,24.175 105.975,24.4 DD1.53@105.975,25.475
  Top Layer w0.5: v1(85.325,20.6) DD6A6.3@85.325,22.303
  Power Layer w0.3: v1(85.325,20.6) 85.325,20.65 86.147,21.472 101.997,21.472 v1(104.7,24.175)
DRV1_SEL_MOD: DA7A6.6 DD1.54 | length 22.5
  Top Layer w0.3: v1(106.175,26.85) 106.232,26.793 106.232,26.567 106.475,26.324 DD1.54@106.475,25.475
  Power Layer w0.3: v1(91.475,27.05) 92.25,26.275 105.6,26.275 v1(106.175,26.85)
  Bottom Layer w0.3: DA7A6.6@87.789,23.2 87.789,23.914 90.925,27.05 v1(91.475,27.05)
DRV2_AN_MOD: DD1.64 DD6A7.5 | length 65.9
  Top Layer w0.3: v1(51.775,20.6) v1@51.78,20.605 ; DD6A7.5@51.78,22.295 DD6A7.5@51.785,22.3 ; v1@111.275,24.256 111.475,24.456 DD1.64@111.475,25.475
  Top Layer w0.5: v1@51.78,20.605 DD6A7.5@51.78,22.295
  GND Layer w0.3: v1(51.775,20.6) 52.69,19.685 53.817,18.558 103.658,18.558 108.244,23.144 110.641,23.144 111.245,23.748 v1@111.245,24.226
  other v1: 111.275,24.2
DRV2_DIG_MOD: DA7A7.3 DD1.62 | length 55.9
  Top Layer w0.3: v1(110.475,24.2) DD1.62@110.475,25.475
  GND Layer w0.3: v1(59.7,20.05) 60.675,19.075 103.35,19.075 107.869,23.594 109.869,23.594 v1(110.475,24.2)
  Bottom Layer w0.3: DA7A7.3@59.641,21.3 59.7,21.241 v1(59.7,20.05)
DRV2_ERR1: DD1.59 DD7A7.7 | length 73.1
  Top Layer w0.3: DD1.59@108.975,25.475 108.975,26.1 108.978,26.103 v1@108.978,26.8
  Top Layer w0.5: DD7A7.7@42.65,18.7 v1(42.65,20.05)
  GND Layer w0.3: v1(42.65,20.05) 45.85,23.25 99.125,23.25 104.225,28.35 107.478,28.35 v1(108.978,26.85)
DRV2_ERR2: DD1.60 DD7A7.6 | length 69.9
  Top Layer w0.3: v1(100.475,22.575) 107.85,22.575 v1(109.475,24.2) ; v1@109.475,24.225 109.475,24.85 DD1.60@109.475,25.475
  Top Layer w0.5: DD7A7.6@43.95,18.7 v1(43.95,20.05)
  GND Layer w0.3: v1(43.95,20.05) 46.5,22.6 100.45,22.6 v1(100.475,22.575)
DRV2_ON: DD1.57 DD6A7.3 | length 59.3
  Top Layer w0.3: DD1.57@107.975,25.475 v1(107.975,26.85)
  Top Layer w0.5: v1(54.325,20.6) DD6A7.3@54.325,22.3
  Power Layer w0.3: v1(54.325,20.6) 59.2,25.475 106.6,25.475 v1(107.975,26.85)
DRV2_SEL_MOD: DA7A7.6 DD1.58 | length 59
  Top Layer w0.3: v1(108.475,24.2) DD1.58@108.475,25.475
  Power Layer w0.3: v1(68.625,19.975) 69.9,18.7 102.975,18.7 v1(108.475,24.2)
  Bottom Layer w0.3: DA7A7.6@57.491,23.2 57.816,23.2 57.941,23.325 57.941,23.65 58.466,24.175 67.075,24.175 68.625,22.625 v1(68.625,19.975)
EMIS_IND: DD1.2 R31.2 | length 37.8
  Top Layer w0.3: DD1.2@116.475,40.525 116.475,41.607 117.068,42.2 134.256,42.2 140.056,36.4 148.425,36.4 149.35,37.325 R31.2@150.2,37.325
ETH_CS: DD1.92 DD9.29 | length 49.1
  Top Layer w0.3: DD1.92@118.5,35 120.9,35 122.153,33.747 157.611,33.747 162.064,38.2 DD9.29@165.2,38.2
ETH_INT: DD1.95 DD9.47 | length 64.5
  Top Layer w0.3: DD1.95@118.5,36.5 121,36.5 122.411,35.089 156.298,35.089 159.709,38.5 v1(161,38.5) ; v1(161,30.9) 161.034,30.866 170.356,30.866 171.5,32.01 DD9.47@171.5,33.4
  Bottom Layer w0.3: v1(161,30.9) v1(161,38.5)
ETH_MISO: DD1.90 DD9.33 | length 48.9
  Top Layer w0.3: DD1.90@118.5,34 120.3,34 121.861,32.439 158.939,32.439 162.2,35.7 163.605,35.7 164.105,36.2 DD9.33@165.2,36.2
ETH_MOSI: DD1.91 DD9.32 | length 48.8
  Top Layer w0.3: DD1.91@118.5,34.5 119.213,34.5 120.597,34.5 121.989,33.108 158.271,33.108 161.463,36.3 163.498,36.3 163.898,36.7 DD9.32@165.2,36.7
ETH_RST: DD1.93 DD9.48 R49.1 | length 65
  Top Layer w0.3: DD1.93@118.5,35.5 121.2,35.5 122.3,34.4 156.9,34.4 v1(160,37.5) ; v1(160,30.9) 160,30.844 160.644,30.2 170.7,30.2 171.321,30.821 171.992,30.821 R49.1@172.02,30.85 172,30.87 DD9.48@172,33.4
  Bottom Layer w0.3: v1(160,30.9) v1(160,37.5)
ETH_SCLK: DD1.89 DD9.30 | length 53
  Top Layer w0.3: DD1.89@118.5,33.5 120,33.5 121.8,31.7 v1(162,31.7) ; v1(162,37) 162.7,37.7 DD9.30@165.2,37.7
  Bottom Layer w0.3: v1(162,31.7) v1(162,37)
EXT_AN_MOD: C85.1 DD1.31 R76.2 | length 67.3
  Top Layer w0.3: R76.2@40.15,34.979 40.2,35.029 C85.1@42.124,35.029 42.139,35.015 43.185,35.015 v1(43.2,35) ; DD1.31@103.45,36.5 104.339,36.5 104.839,37 v1(104.9,37)
  Power Layer w0.3: v1(97.475,35) 100.363,35 102.363,37 v1(104.9,37)
  GND Layer w0.3: v1(43.2,35) v1(97.475,35)
EXT_COM1: DD1.38 DD12.13 | length 84.6
  Top Layer w0.3: DD12.13@28.5,15.86 31.139,15.86 31.167,15.888 32.213,15.888 33.8,17.475 v1(33.8,18.3) ; v1(101.5,33.95) 102.45,33 DD1.38@103.45,33
  GND Layer w0.3: v1(33.8,18.3) 33.8,20.555 41.845,28.6 93.109,28.6 98.459,33.95 v1(101.5,33.95)
EXT_COM2: DD1.39 DD12.12 | length 87.5
  Top Layer w0.3: DD12.12@28.5,14.59 28.598,14.688 31.994,14.688 35.1,17.794 v1(35.1,20.55) ; DD1.39@103.45,32.5 104.5,32.5 v1(104.9,32.9)
  GND Layer w0.3: v1(35.1,20.55) 42.7,28.15 93.498,28.15 98.648,33.3 103.7,33.3 104.1,32.9 v1(104.9,32.9)
EXT_COM3: DD1.40 DD12.11 | length 84.8
  Top Layer w0.3: DD12.11@28.5,13.32 31.845,13.32 35.8,17.275 v1(35.8,19.9) ; v1(101.5,32.65) 102.15,32 DD1.40@103.45,32
  GND Layer w0.3: v1(35.8,19.9) 43.6,27.7 93.896,27.7 98.846,32.65 v1(101.5,32.65)
EXT_DIG_MOD: DA7A6.1 DA7A7.1 DD1.36 DD12.14 | length 133.5
  Top Layer w0.3: DD12.14@28.5,17.13 31.63,17.13 32.8,18.3 v1(32.8,18.325) ; v1(101.5,34.925) 101.5,34.9 102.4,34 DD1.36@103.45,34
  Power Layer w0.3: v1(67.65,22) 68.236,22.586 68.236,22.686 69.4,23.85 v1(90.875,23.85)
  GND Layer w0.3: v1(32.8,18.325) 32.8,20.776 46.424,34.4 100.964,34.4 101.489,34.925 v1(101.5,34.925)
  Bottom Layer w0.3: DA7A7.1@59.641,23.2 66.55,23.2 67.064,22.686 67.064,22.586 v1(67.65,22) ; DA7A6.1@89.939,23.2 90.064,23.325 90.389,23.325 90.875,23.811 v1(90.875,23.85) ; v1@90.862,23.862 90.887,23.862 96.188,29.163 96.188,29.613 v1(101.5,34.925)
EXT_FLAG1: DD1.41 R77.2 | length 85.1
  Top Layer w0.3: DD1.41@103.45,31.5 104.4,31.5 v1(104.9,32)
  GND Layer w0.3: v1(31.7,16.488) 33.488,16.488 43.25,26.25 93.595,26.25 99.345,32 v1(104.9,32)
  Bottom Layer w0.3: R77.2@30.075,19.2 30.867,19.2 31.7,18.367 v1(31.7,16.488)
EXT_FLAG2: DD1.42 R78.2 | length 80.8
  Top Layer w0.3: v1(101.5,31.4) 101.5,31.376 101.876,31 DD1.42@103.45,31
  GND Layer w0.3: v1(31.7,15.288) 33.388,15.288 43.9,25.8 93.998,25.8 99.548,31.35 101.45,31.35 v1(101.5,31.4)
  Bottom Layer w0.3: R78.2@30.075,16.7 30.075,16.65 30.35,16.375 30.617,16.375 v1@31.704,15.288
EXT_FLAG3: DD1.43 R79.2 | length 83.5
  Top Layer w0.3: DD1.43@103.45,30.5 104.4,30.5 v1(104.9,31)
  GND Layer w0.3: v1(31.7,14.088) 33.238,14.088 44.5,25.35 94.428,25.35 99.728,30.65 103.638,30.65 103.98,30.992 v1@104.867,30.992
  Bottom Layer w0.3: R79.2@30.075,14.1 30.087,14.088 v1(31.7,14.088)
EXT_FLAG4: DD1.44 R80.2 | length 81
  Top Layer w0.3: v1(101.5,29.5) 102,30 DD1.44@103.45,30
  GND Layer w0.3: v1(31.7,11.6) 45,24.9 94.872,24.9 99.472,29.5 v1(101.5,29.5)
  Bottom Layer w0.3: R80.2@30.075,11.6 v1(31.7,11.6)
EXT_IL1: DD1.32 R70.2 U4.16 | length 90.1
  Top Layer w0.3: U4.16@26.92,54 R70.2@28.95,54 28.975,53.975 28.975,53.025 v1(29,53) ; DD1.32@103.45,36 104.719,36 104.819,36.1 v1(104.9,36.1)
  GND Layer w0.3: v1(29,53) 32.95,49.05 32.95,44.525 38.35,39.125 97.61,39.125 100.035,36.7 104.3,36.7 v1(104.9,36.1)
EXT_IL2: DD1.33 R72.2 U4.14 | length 85.5
  Top Layer w0.3: U4.14@26.9,51.48 R72.2@28.93,51.48 ; R72.2@28.95,51.5 28.975,51.475 28.975,50.525 v1(29,50.5) ; v1(98.7,37) 100.175,35.525 101.749,35.525 101.774,35.5 DD1.33@103.45,35.5
  GND Layer w0.3: v1(29,50.5) 32.225,47.275 32.225,44.175 37.725,38.675 97.025,38.675 v1(98.7,37)
EXT_KEY: DD1.34 R73.2 U4.12 | length 86.7
  Top Layer w0.3: U4.12@26.9,48.94 28.91,48.94 R73.2@28.95,48.9 ; R73.2@28.95,48.94 28.975,48.915 28.975,47.965 v1(29,47.94) ; DD1.34@103.45,35 104.551,35 v1(104.9,35.35) v1(104.9,35.35)
  GND Layer w0.3: v1(29,47.94) 31.45,45.49 31.45,43.95 37.175,38.225 96.475,38.225 98.569,36.131 103.653,36.131 104.435,35.35 v1(104.9,35.35)
EXT_MP_EN: DD1.35 R74.2 U4.10 | length 84.9
  Top Layer w0.3: U4.10@26.9,46.4 R74.2@28.95,46.4 28.975,46.375 28.975,45.425 v1(29,45.4) ; DD1.35@103.45,34.5 v1(104.9,34.5)
  GND Layer w0.3: v1(29,45.4) 36.625,37.775 95.925,37.775 98.15,35.55 103.104,35.55 104.154,34.5 v1(104.9,34.5)
EXT_PMO: DD1.45 DD13.2 | length 82.6
  Top Layer w0.3: DD13.2@26.8,23.2 26.812,23.187 44.698,23.187 v1(44.71,23.175) ; DD1.45@103.45,29.5 104.4,29.5 v1(104.9,30)
  GND Layer w0.3: v1(44.71,23.175) 45.985,24.45 92.274,24.45 92.299,24.425 99.325,24.425 v1(104.9,30)
FIBER_IL: DD1.5 DD8.4 | length 35.2
  Top Layer w0.3: DD8.4@111.15,10.95 111.15,11.275 111.275,11.4 112.1,11.4 v1(119.1,18.4) ; v1(114.8,32.7) 114.8,32.781 114.975,32.956 DD1.5@114.975,40.525
  Power Layer w0.3: v1(114.8,32.7) 114.8,31.495 119.1,27.195 v1(119.1,18.4)
FLAG1_HW: R85.2 U6.15 XP9.19 | length 18.5
  Bottom Layer w0.3: XP9.19@3.6,20.5 5.05,19.05 18.55,19.05 18.875,18.725 R85.2@18.875,17.94 U6.15@20.6,17.94
FLAG2_HW: R86.2 U6.13 XP9.22 | length 20.4
  Bottom Layer w0.3: XP9.22@1.6,18.5 2.6,17.5 4.6,17.5 5.682,16.418 18.128,16.418 18.6,15.946 18.6,15.675 R86.2@18.875,15.4 U6.13@20.6,15.4
FLAG3_HW: R88.2 U6.11 XP9.23 | length 19
  Bottom Layer w0.3: XP9.23@3.6,16.5 5.996,14.104 18.396,14.104 18.875,13.625 R88.2@18.875,12.86 U6.11@20.6,12.86 ; U6.11@20.585,13.02 U6.11@20.625,12.98
FLAG4_HW: R89.2 U6.9 XP9.24 | length 21.8
  Bottom Layer w0.3: XP9.24@1.6,16.5 6.9,11.2 18.467,11.2 18.643,11.024 18.643,10.552 R89.2@18.875,10.32 U6.9@20.6,10.32
GND: C2.2 C4.2 C5.2 C6.2 C8.1 C9.1 C10.1 C12.2 C14.2 C15.2 C16.2 C17.2 C18.2 C19.2 C20.2 C21.2 C22.2 C32.2 C33.2 C34.2 C42A6.2 C42A7.2 C43A6.2 C43A7.2 C44A6.2 C44A7.2 C52.2 C53.2 C54.2 C56.2 C57.2 C58.2 C59.2 C60.2 C61.2 C62.2 C63.2 C64.2 C65.2 C66.2 C67.2 C68.2 C69.2 C70.2 C71.2 C72.2 C73.2 C74.2 C82.2 C83.2 C86.2 DA1.7 DA2.2 DA2.3 DA2.5 DA2.6 DA2.7 DA7A6.2 DA7A7.2 DA11.5 DA12.5 DA13.2 DD1.10 DD1.27 DD1.74 DD1.99 DD2.4 DD3.9 DD3.15 DD4.4 DD5.2 DD5.3 DD5.8 DD6A6.2 DD6A6.6 DD6A6.8 DD6A7.2 DD6A7.6 DD6A7.8 DD7A6.5 DD7A7.5 DD8.3 DD9.1 DD9.7 DD9.10 DD9.16 DD9.23 DD9.25 DD9.26 DD9.27 DD9.28 DD9.46 DD11.4 DD12.9 DD12.15 DD13.4 GB1.1 R1.1 R2.1 R3.2 R4.2 R25.2 R28.1 R29.1 R45.1 U1.2 U2.2 U3.2 U4.9 U4.11 U4.13 U4.15 U6.2 U6.4 U6.6 U6.8 VD1.2 VD2.2 VD3.2 XP3.3 XP8.2 ZQ1.2 ZQ1.4 ZQ3.2 ZQ3.4 | length 191
  Top Layer w0.3: DD12.15@28.5,18.4 30.45,18.4 C83.2@30.6,18.25 ; R2.1@97.865,43.05 R2.1@98.065,42.85 ; DD1.27@103.45,38.5 104.551,38.5 104.927,38.876 104.927,39.124 104.151,39.9 103.951,39.9 ; XP8.2@110.2,2.3 C56.2@110.2,5.5 ; DD1.10@112.475,40.525 112.475,39.374 112.8,39.049 ; ZQ1.2@113.175,49.275 113.225,49.325 C18.2@113.225,50.875 ; v1(114.275,45.2) 114.275,45.281 114.5,45.506 114.5,46.1 C21.2@114.775,46.375 114.775,47.875 ZQ1.4@114.875,47.975 ; 115.758,27.126 116.475,26.409 DD1.74@116.475,25.475 116.475,24.225 ; 116.962,37.912 117.55,38.5 DD1.99@118.5,38.5 ; 117.775,21.975 117.775,22.675 C14.2@118,22.9 ; C19.2@117.875,48.025 117.875,48.625 ; C20.2@117.875,49.375 117.875,48.625 ; 119.025,48.625 117.875,48.625 ; C52.2@120.55,21.1 R25.2@120.55,15.9 120.55,12.621 120.85,12.321 121.637,12.321 DA12.5@121.65,12.307 ; 120.559,17.55 DA11.5@121.65,17.55 ; DD9.28@165.2,38.7 DD9.27@165.2,39.2 DD9.26@165.2,39.7 DD9.25@165.2,40.2 ; ZQ3.4@170.975,46.7 171.425,47.15 171.425,47.375 172.225,48.175 172.225,48.45 172.525,48.75 C64.2@174.375,48.75 175.937,48.75 R45.1@175.975,48.712 ; DA2.7@171.1,23.4 171.85,23.4 172.326,23.4 cw(c172.326,22.376) 172.775,23.296 C4.2@173.1,23.1 ; 171.5,34.7 DD9.1@173.3,34.7 ; 171.9,39.2 DD9.10@173.3,39.2 ; C66.2@172.6,50.7 172.6,48.975 ZQ3.2@172.675,48.9
  Top Layer w0.5: C5.2@96.365,43.05 R2.1@97.865,43.05 ; VD1.2@106.4,51.1 VD2.2@108.31,51.1 VD3.2@110.225,51.1 ; DD3.9@145.54,20.01 145.59,20.06 145.59,21.288 145.65,21.348 145.65,21.9 C34.2@145.825,22.075 ; C32.2@149.725,22.075 149.9,21.9 149.9,21.35 150.024,21.226 DD4.4@150.024,19.8 ; DA2.6@171.1,22.1 DA2.7@171.1,23.4
  Top Layer w0.6: R1.1@88.285,50.909 90.741,50.909
  GND Layer w0.5: 39,17.9 v1(46.3,17.9) v1(47.5,17.9) v1(48.7,17.9) v1(50,17.9) v1(51.3,17.9) v1(52.5,17.9) v1(53.7,17.9) v1(55,17.9) v1(56.2,17.9) v1(57.3,17.9) v1(58.5,17.9) v1(59.7,17.9) v1(60.9,17.9) v1(62.2,17.9) v1(63.5,17.9) v1(64.7,17.9) v1(65.8,17.9) v1(67,17.9) v1(77.9,17.9) v1(80.1,17.9) v1(81.3,17.9) v1(82.5,17.9) v1(83.7,17.9) v1(85,17.9) v1(86.2,17.9) v1(87.4,17.9) v1(88.6,17.9) v1(90,17.9) v1(91.4,17.9) v1(93.15,17.9) v1(94.9,17.9) ; v1@94.927,17.9 v1(94.9,17.9) ; v1(134.2,18.5) v1(132.4,18.5) v1(131.3,17.4) v1(129.4,15.5) v1(127.7,13.8) v1(120.1,13.8) v1(118.1,13.8) v1(115.9,13.8) v1(112.9,13.8) v1(111,13.8) v1(108.8,13.8) v1(106.6,13.8) v1(104.6,13.8) v1(102.2,13.8) v1(99.7,13.8) v1(98.357,15.143) v1(97.3,16.2) v1(96.2,17.3) ; v1(94.9,17.9) 94.919,17.881 95.592,17.881 96.173,17.3 v1(96.2,17.3) ; v1(96.2,17.3) 96.181,17.319 v1(96.2,17.3)
  Bottom Layer w0.3: 25.64,12.8 25.64,10.66 25.976,10.324 U6.8@26.816,10.324 ; 92.039,21.45 92.314,21.725 92.575,21.725 92.725,21.875 93.155,21.875 93.53,22.25 ; DD5.2@137.92,20.01 137.92,18.376 138.096,18.2 139.19,18.2 ; DD5.3@139.19,20.01 139.19,18.2 ; DD5.8@145.54,20.01 145.54,18.376 145.364,18.2 139.19,18.2 ; DA13.2@184.3,27.225 184.312,27.212 185.588,27.212 v1(185.6,27.2)
  Bottom Layer w0.5: 93.53,22.25 94.714,22.25 ; 113.109,38.74 113.375,38.474 113.375,38.075 C8.1@113.55,37.9 C15.2@115.4,37.9 ; DD5.8@145.54,20.01 145.59,20.06 145.59,21.291 145.65,21.351 145.65,21.9 C33.2@145.825,22.075
  Bottom Layer w1: C2.2@180.175,17.613 180.175,17.547 180.275,17.447 183.618,17.447 DA1.7@183.675,17.39
  other v1: 104.7,0.4 106.4,0.4 108.1,0.4 109.8,0.4 112.3,0.4 115.2,0.4 118.2,0.4 125.2,0.5 127.7,0.5 116.7,1.6 104.7,3 112.4,3 115.2,3 118.2,3 125.2,3.2 127.7,3.2 106.4,4.5 113.8,4.5 116.7,4.5 104.7,5.9 112.4,5.9 115.2,5.9 127.7,6.1 106.4,7.3 113.8,7.3 104.7,8.75 112.4,8.75 115.2,8.75 127.7,8.75 112.9,11.1 115.9,11.1 118.1,11.1 127.7,11.1 104.6,11.2 106.5,11.2 102.2,11.3 108.875,15.9 126,16.1 99.7,16.2 102.2,16.2 104.6,16.2 106.5,16.2 127.7,16.2 126,16.9 127.7,17.6 79.016,17.883 99.7,17.9 102.2,17.9 104.6,17.9 106.5,17.9 129.7,18.6 47.375,19.775 50,19.775 81.45,19.95 78.95,20 65.575,20.875 62.35,20.95 32.2,21.3 168,22.225 31.4,22.5 33.1,22.5 33.1,23.9 177.725,24 168,24.475 32.1,24.9 125,26.4 140,27 143,27 146,27 149,27 152,27 155,27 163.45,27 168.525,27 171.4,27 174.4,27 177.725,27 125,27.06 99.3,27.5 100.4,27.5 26.1,28 31.4,28.2 26.1,29.5 137,30 140,30 143,30 146,30 149,30 152,30 31.4,30.7 107.6,30.7 26.1,31 89.5,31 91.5,31 93.5,31 113.025,31.7 164.7,31.7 166.5,31.7 177.3,31.7 174.9,31.8 26.1,32.5 165.5,32.7 173.6,32.9 175.8,32.9 89.5,33 91.5,33 93.5,33 96.05,33 31.4,33.3 26.1,34 113,34.3 107.575,34.875 182.5,35.2 26.1,35.5 167.3,35.6 169.1,35.6 170.8,35.6 31.3,36 91.5,36.5 93.5,36.5 95.95,36.5 177.6,36.6 124.8,36.7 127.1,36.7 129.4,36.7 131.6,36.7 133.8,36.7 136.2,36.7 182.5,36.7 167.3,37.3 169.1,37.3 170.8,37.3 177.6,38.3 182.5,38.7 189.1,38.7 144.375,38.775 31.3,38.8 122.3,39 124.1,39 126.1,39 128.3,39 130.4,39 132.5,39 134.7,39 167.3,39 169.1,39 170.8,39 140.1,39.8 93.5,40 95.95,40 182.5,40.3 189.1,40.5 139,41 31.3,41.5 137.9,42.2 187,42.5 189.1,42.5 182.5,43.3 89.5,43.5 93.15,43.5 160,44 163,44 184.6,44.2 187,44.2 182.5,46.1 184.6,46.1 187,46.1 89.5,47 91.5,47 93.5,47 160,47 163,47 166,47 89.5,49 91.5,49 93.5,49 160,50 163,50 166,50 183,50 186,50 174.4,50.7 91.5,51 93.5,51 121.7,52.4 123.5,52.4 125.3,52.4 127.1,52.4 129,52.4 131,52.4 133,52.4 135.1,52.4 160,53 163,53 166,53 180,53 183,53 186,53 111.675,53.5 114.05,53.5 116.7,53.5 119.55,53.5 91.5,54 93.5,54
GND_24V: C1.2 C31.2 C41A6.2 C41A7.2 C87.2 DA1.1 DA5.1 DA8A6.1 DA8A7.1 DA16.1 U1.3 U2.3 U3.3 XP2.2 | length 255.6
  Top Layer w0.3: U3.3@148.175,47.275 v1(148.175,48.675) ; U2.3@151.475,47.275 v1(151.475,48.675) ; U1.3@154.775,47.275 v1(154.775,48.675)
  GND Layer w0.8: v1(148.175,48.675) v1(151.475,48.675) v1(154.775,48.675) 155.875,47.575 155.875,30.6 v3(159.175,27.3) ; 159.15,16.575 159.15,19.05 v3(159.175,19.075)
  GND Layer w1: DA16.1@31.38,2.6 33.952,5.172 33.952,12.527 37.925,16.5 95.343,16.5 99.469,12.374 128.824,12.374 133.025,16.575 159.15,16.575 ; DA8A7.1@60.075,9.7 60.075,16.452 ; DA8A6.1@91.045,9.703 96.316,14.975 ; DA5.1@159.15,9.7 159.15,16.575 ; XP2.2@173.4,4.9 161.725,16.575 159.15,16.575
  Bottom Layer w0.3: C87.2@31.38,5.58 C87.2@31.8,6
  Bottom Layer w0.8: v3(159.175,19.075) v3(159.175,27.3)
  Bottom Layer w1: DA16.1@31.38,2.6 C87.2@31.38,5.58 ; DA8A7.1@60.075,9.7 61.675,11.3 62.175,11.3 62.775,11.9 C41A7.2@62.775,12.1 ; DA8A6.1@91.045,9.703 92.745,11.403 93.145,11.403 93.745,12.003 C41A6.2@93.745,12.203 ; DA5.1@159.15,9.7 159.15,12.475 160.375,13.7 C31.2@162.65,13.7 ; XP2.2@173.4,4.9 176.119,2.181 C1.2@180.175,2.181 180.19,2.181 DA1.1@183.644,2.181
GND_DRVA6: C45A6.2 C46A6.2 C47A6.2 C48A6.1 C49A6.2 C50A6.2 C51A6.2 DA8A6.3 DA9A6.2 DA10A6.5 DD6A6.9 DD6A6.15 DD7A6.4 XP5A6.2 | length 38.2
  Top Layer w0.3: C50A6.2@86.485,8.853 86.485,10.353 86.54,10.408 86.54,12.698 DD6A6.15@86.595,12.753
  GND Layer w1: XP5A6.2@75.185,1.653 74.185,1.653 72.845,2.994 v1(72.845,6.103) 72.845,7.203 75.345,9.703 v1(77.645,9.703) 77.645,8.403 80.145,5.903 v1@84.345,5.903 ; v1(84.445,5.903) 85.725,4.623 DA8A6.3@91.229,4.623
  Bottom Layer w0.3: DA9A6.2@69.645,5.003 69.645,5.078 C51A6.2@69.645,6.67
  Bottom Layer w1: C45A6.2@87.955,5.204 88.455,4.704 89.06,4.704 89.14,4.623 DA8A6.3@91.045,4.623
  other v1: 68.87,0.703 84.245,1.203 86.145,1.203 66.125,1.877 69.645,2.003 86.145,2.903 82.945,7.203 72.845,7.303 66.3,7.725 85.375,8.7 68.9,9.5 85.375,9.5 66.375,9.575 85.375,10.25 66.35,10.875 68.9,10.95 77.55,11.65 68.9,12.628 77.56,13.151